# EAGLE board duplicated_boards (EAGLE 7.2.0), part 1 of 2
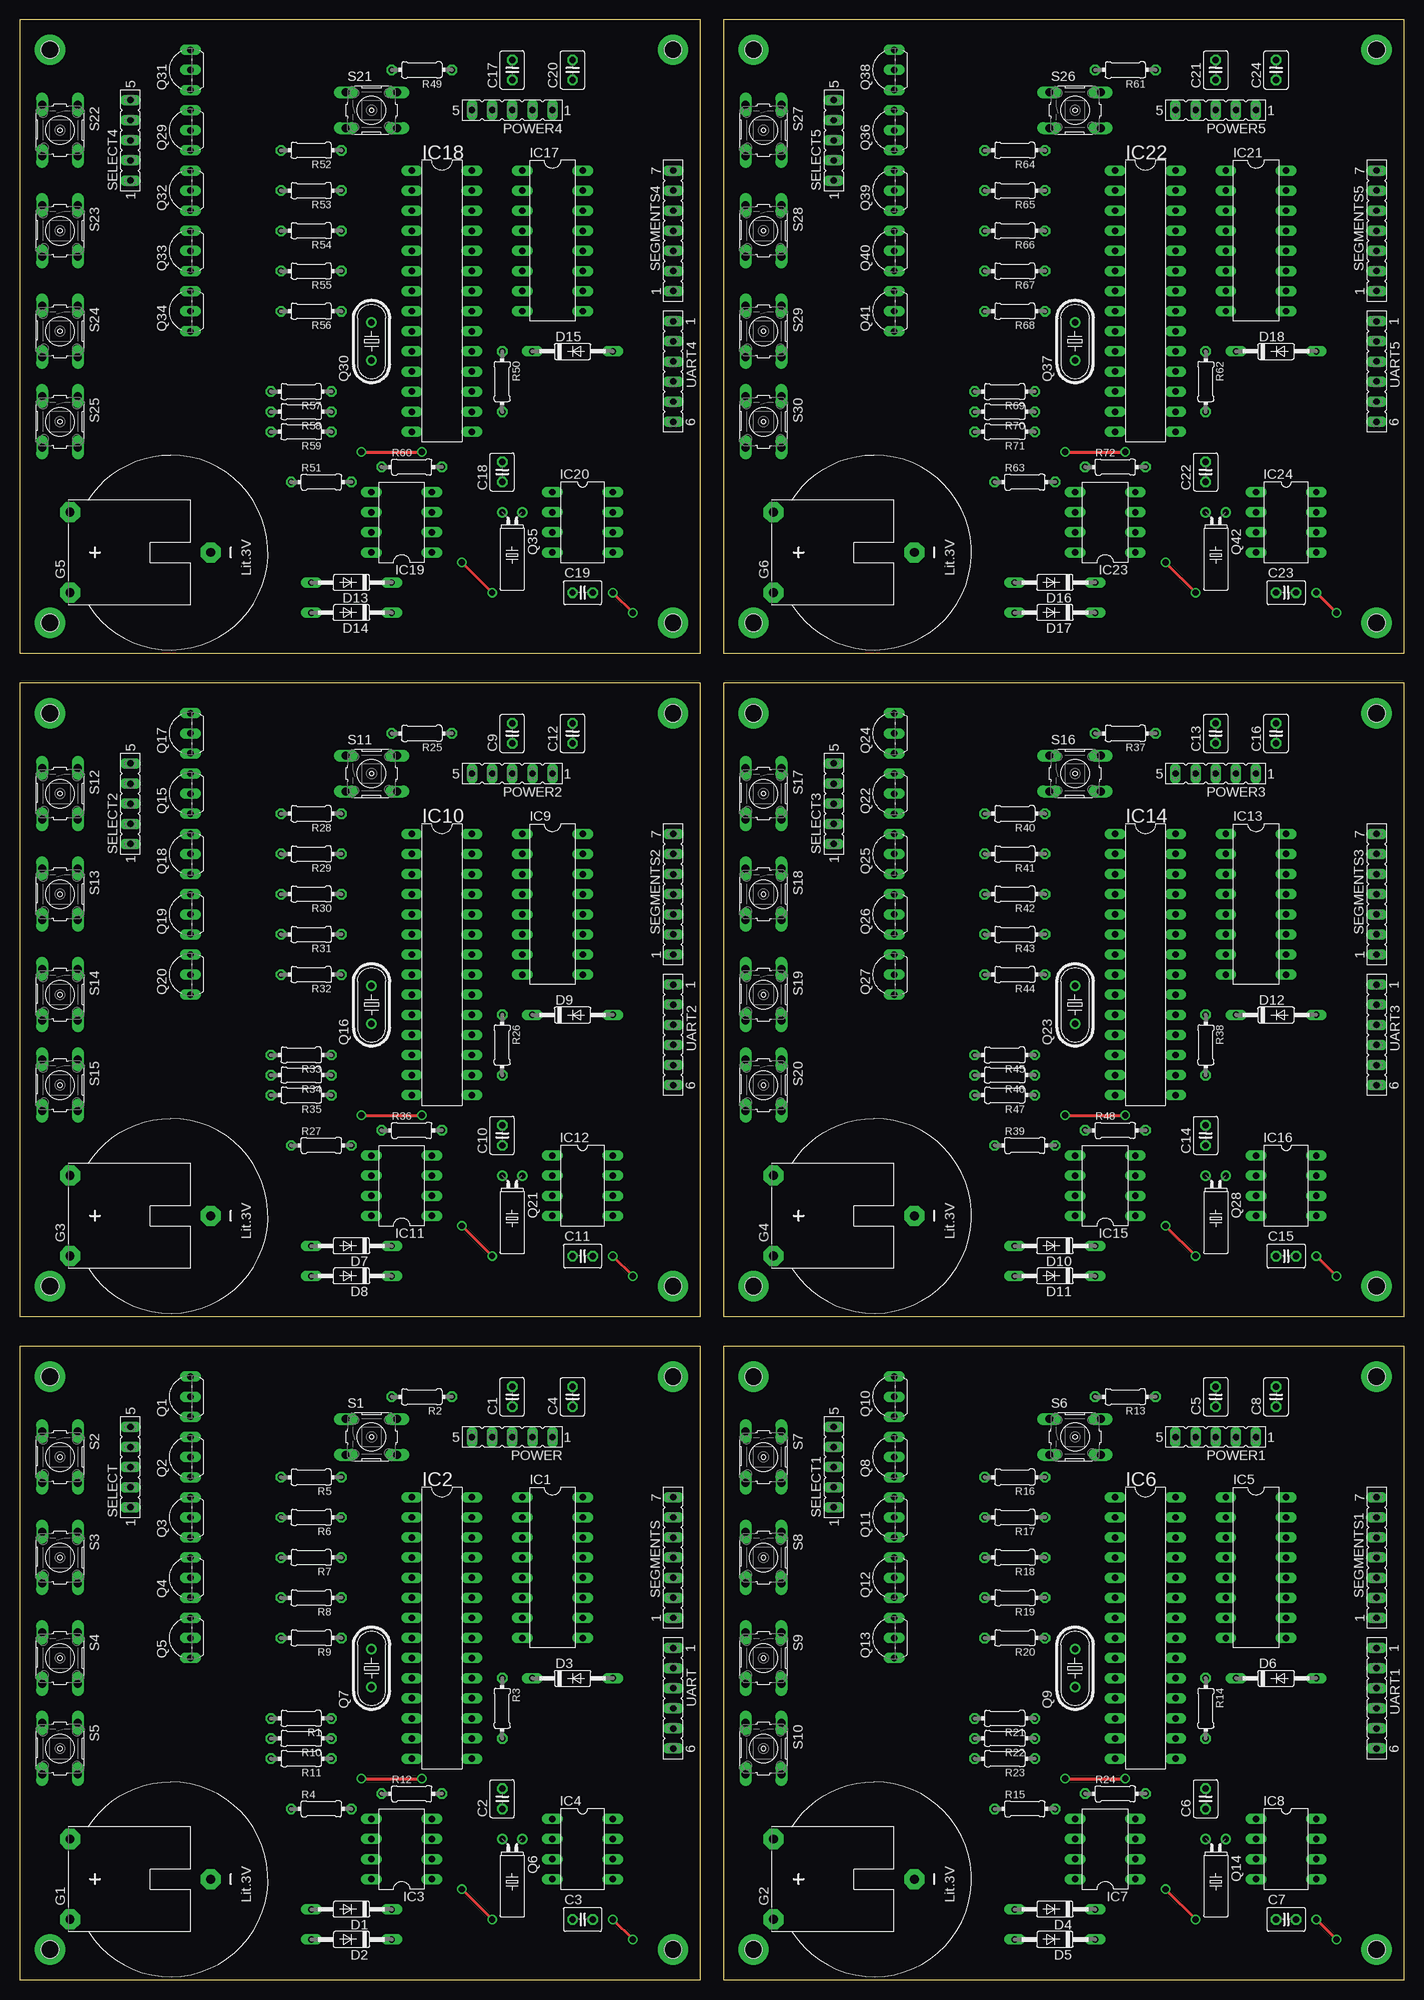
[diagram p0: board, top side]
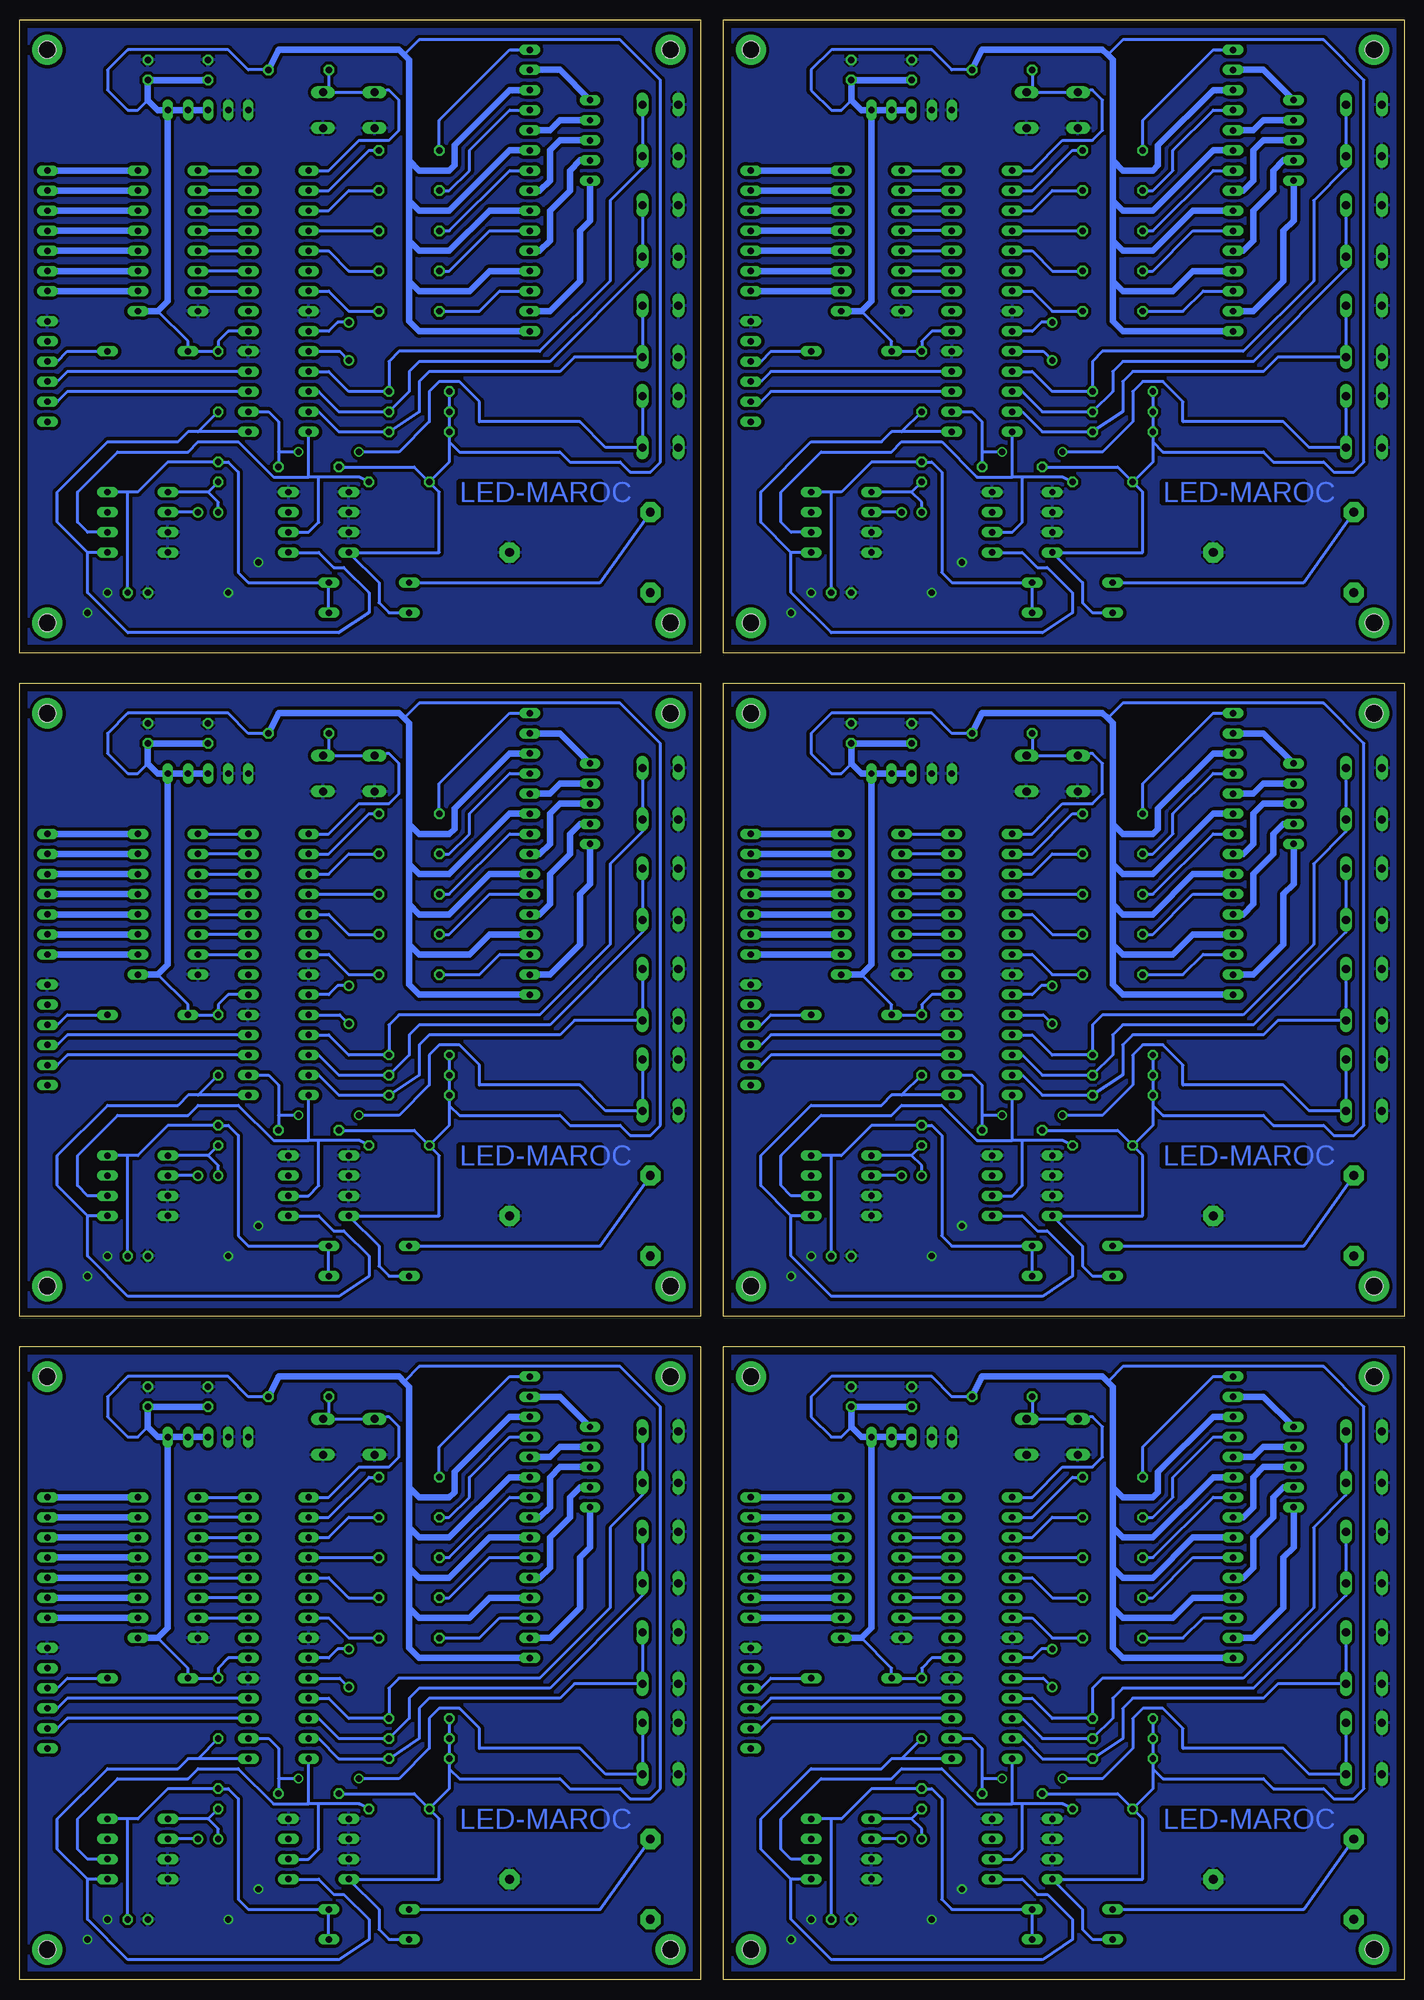
[diagram p1: board, bottom side, seen from below]

Size 174.93 x 247.64 mm. Coordinates in mm from the lower left corner, seen from the top.
Outline: 0,0 86.03,0 86.03,80 0,80 0,0
Outline: 88.9,0 174.93,0 174.93,80 88.9,80 88.9,0
Outline: 0,83.82 86.03,83.82 86.03,163.82 0,163.82 0,83.82
Outline: 88.9,83.82 174.93,83.82 174.93,163.82 88.9,163.82 88.9,83.82
Outline: 0,167.64 86.03,167.64 86.03,247.64 0,247.64 0,167.64
Outline: 88.9,167.64 174.93,167.64 174.93,247.64 88.9,247.64 88.9,167.64
Copper layers (1*16): Top 0.035mm / dielectric 1.5mm / Bottom 0.035mm
Design rules "default *": minimum track width 10mil, minimum drill 24mil, track to track 16mil, track to pad 16mil, pad to pad 16mil, via to via 16mil, smd to smd 8mil, copper to edge 40mil, drill to drill 8mil, minimum pad ring 10mil, minimum via ring 8mil, stop-mask expansion 4mil, vias tented up to drill 0mil, thermal gap 10mil
Holes 2.2 mm at 3.81,76.2 3.81,3.81 82.55,3.81 82.55,76.2 92.71,76.2 92.71,3.81 171.45,3.81 171.45,76.2 3.81,160.02 3.81,87.63 82.55,87.63 82.55,160.02 92.71,160.02 92.71,87.63 171.45,87.63 171.45,160.02 3.81,243.84 3.81,171.45 82.55,171.45 82.55,243.84 92.71,243.84 92.71,171.45 171.45,171.45 171.45,243.84

## Footprints (pad centres in the part's own frame; a part is rotated, then mirrored left to right if it is on the bottom)
C025-030X050 = drill 0.813 octagon: 1 -1.27,0; 2 1.27,0
DO35-10 = drill 0.813 long: A 5.08,0; C -5.08,0
CR2430H = drill 1.118 pad 2.54 octagon: + 5.08,12.7; +@1 -5.08,12.7; - 0,-5.08
DIL16 = drill 0.813 long: 1 -8.89,-3.81; 2 -6.35,-3.81; 3 -3.81,-3.81; 4 -1.27,-3.81; 5 1.27,-3.81; 6 3.81,-3.81; 7 6.35,-3.81; 8 8.89,-3.81; 9 8.89,3.81; 10 6.35,3.81; 11 3.81,3.81; 12 1.27,3.81; 13 -1.27,3.81; 14 -3.81,3.81; 15 -6.35,3.81; 16 -8.89,3.81
DIL28-3 = drill 0.813 long: 1 -16.51,-3.81; 2 -13.97,-3.81; 3 -11.43,-3.81; 4 -8.89,-3.81; 5 -6.35,-3.81; 6 -3.81,-3.81; 7 -1.27,-3.81; 8 1.27,-3.81; 9 3.81,-3.81; 10 6.35,-3.81; 11 8.89,-3.81; 12 11.43,-3.81; 13 13.97,-3.81; 14 16.51,-3.81; 15 16.51,3.81; 16 13.97,3.81; 17 11.43,3.81; 18 8.89,3.81; 19 6.35,3.81; 20 3.81,3.81; 21 1.27,3.81; 22 -1.27,3.81; 23 -3.81,3.81; 24 -6.35,3.81; 25 -8.89,3.81; 26 -11.43,3.81; 27 -13.97,3.81; 28 -16.51,3.81
DIL08 = drill 0.813 long: 1 -3.81,-3.81; 2 -1.27,-3.81; 3 1.27,-3.81; 4 3.81,-3.81; 5 3.81,3.81; 6 1.27,3.81; 7 -1.27,3.81; 8 -3.81,3.81
FE05-1 = drill 0.813 long: 1 -5.08,0; 2 -2.54,0; 3 0,0; 4 2.54,0; 5 5.08,0
TO92-BCE = drill 0.813 long: B 2.54,0; C 0,0; E -2.54,0
TC38H = drill 0.813: 1 -1.27,0; 2 1.27,0
HC49U-V = drill 0.813: 1 -2.413,0; 2 2.413,0
0204/7 = drill 0.813 octagon: 1 -3.81,0; 2 3.81,0
B3F-10XX = drill 1.016 long: 1 -3.251,2.261; 2 3.251,2.261; 3 -3.251,-2.261; 4 3.251,-2.261
FE07 = drill 0.813 long: 1 -7.62,0; 2 -5.08,0; 3 -2.54,0; 4 0,0; 5 2.54,0; 6 5.08,0; 7 7.62,0
FE06 = drill 0.813 long: 1 -6.35,0; 2 -3.81,0; 3 -1.27,0; 4 1.27,0; 5 3.81,0; 6 6.35,0

## Placement (x,y rotation side)
C1  100n  [C025-030X050]  62.23,73.66 90 top
C2  10p  [C025-030X050]  60.96,22.86 90 top
C3  470n  [C025-030X050]  71.12,7.62 0 top
C4  100n  [C025-030X050]  69.85,73.66 90 top
C5  100n  [C025-030X050]  151.13,73.66 90 top
C6  10p  [C025-030X050]  149.86,22.86 90 top
C7  470n  [C025-030X050]  160.02,7.62 0 top
C8  100n  [C025-030X050]  158.75,73.66 90 top
C9  100n  [C025-030X050]  62.23,157.48 90 top
C10  10p  [C025-030X050]  60.96,106.68 90 top
C11  470n  [C025-030X050]  71.12,91.44 0 top
C12  100n  [C025-030X050]  69.85,157.48 90 top
C13  100n  [C025-030X050]  151.13,157.48 90 top
C14  10p  [C025-030X050]  149.86,106.68 90 top
C15  470n  [C025-030X050]  160.02,91.44 0 top
C16  100n  [C025-030X050]  158.75,157.48 90 top
C17  100n  [C025-030X050]  62.23,241.3 90 top
C18  10p  [C025-030X050]  60.96,190.5 90 top
C19  470n  [C025-030X050]  71.12,175.26 0 top
C20  100n  [C025-030X050]  69.85,241.3 90 top
C21  100n  [C025-030X050]  151.13,241.3 90 top
C22  10p  [C025-030X050]  149.86,190.5 90 top
C23  470n  [C025-030X050]  160.02,175.26 0 top
C24  100n  [C025-030X050]  158.75,241.3 90 top
D1  1N4446  [DO35-10]  41.91,8.89 180 top
D2  1N4446  [DO35-10]  41.91,5.08 180 top
D3  1N4446  [DO35-10]  69.85,38.1 0 top
D4  1N4446  [DO35-10]  130.81,8.89 180 top
D5  1N4446  [DO35-10]  130.81,5.08 180 top
D6  1N4446  [DO35-10]  158.75,38.1 0 top
D7  1N4446  [DO35-10]  41.91,92.71 180 top
D8  1N4446  [DO35-10]  41.91,88.9 180 top
D9  1N4446  [DO35-10]  69.85,121.92 0 top
D10  1N4446  [DO35-10]  130.81,92.71 180 top
D11  1N4446  [DO35-10]  130.81,88.9 180 top
D12  1N4446  [DO35-10]  158.75,121.92 0 top
D13  1N4446  [DO35-10]  41.91,176.53 180 top
D14  1N4446  [DO35-10]  41.91,172.72 180 top
D15  1N4446  [DO35-10]  69.85,205.74 0 top
D16  1N4446  [DO35-10]  130.81,176.53 180 top
D17  1N4446  [DO35-10]  130.81,172.72 180 top
D18  1N4446  [DO35-10]  158.75,205.74 0 top
G1  CR2430H  [CR2430H]  19.05,12.7 90 top
G2  CR2430H  [CR2430H]  107.95,12.7 90 top
G3  CR2430H  [CR2430H]  19.05,96.52 90 top
G4  CR2430H  [CR2430H]  107.95,96.52 90 top
G5  CR2430H  [CR2430H]  19.05,180.34 90 top
G6  CR2430H  [CR2430H]  107.95,180.34 90 top
IC1  ULN2003AN  [DIL16]  67.31,52.07 270 top
IC2  PIC16876P  [DIL28-3]  53.34,44.45 270 top
IC3  DS1621  [DIL08]  48.26,16.51 90 top
IC4  PCF8583P  [DIL08]  71.12,16.51 270 top
IC5  ULN2003AN  [DIL16]  156.21,52.07 270 top
IC6  PIC16876P  [DIL28-3]  142.24,44.45 270 top
IC7  DS1621  [DIL08]  137.16,16.51 90 top
IC8  PCF8583P  [DIL08]  160.02,16.51 270 top
IC9  ULN2003AN  [DIL16]  67.31,135.89 270 top
IC10  PIC16876P  [DIL28-3]  53.34,128.27 270 top
IC11  DS1621  [DIL08]  48.26,100.33 90 top
IC12  PCF8583P  [DIL08]  71.12,100.33 270 top
IC13  ULN2003AN  [DIL16]  156.21,135.89 270 top
IC14  PIC16876P  [DIL28-3]  142.24,128.27 270 top
IC15  DS1621  [DIL08]  137.16,100.33 90 top
IC16  PCF8583P  [DIL08]  160.02,100.33 270 top
IC17  ULN2003AN  [DIL16]  67.31,219.71 270 top
IC18  PIC16876P  [DIL28-3]  53.34,212.09 270 top
IC19  DS1621  [DIL08]  48.26,184.15 90 top
IC20  PCF8583P  [DIL08]  71.12,184.15 270 top
IC21  ULN2003AN  [DIL16]  156.21,219.71 270 top
IC22  PIC16876P  [DIL28-3]  142.24,212.09 270 top
IC23  DS1621  [DIL08]  137.16,184.15 90 top
IC24  PCF8583P  [DIL08]  160.02,184.15 270 top
POWER  5V  [FE05-1]  62.23,68.58 180 top
POWER1  5V  [FE05-1]  151.13,68.58 180 top
POWER2  5V  [FE05-1]  62.23,152.4 180 top
POWER3  5V  [FE05-1]  151.13,152.4 180 top
POWER4  5V  [FE05-1]  62.23,236.22 180 top
POWER5  5V  [FE05-1]  151.13,236.22 180 top
Q1  BC369  [TO92-BCE]  21.59,73.66 90 top
Q2  BC369  [TO92-BCE]  21.59,66.04 90 top
Q3  BC369  [TO92-BCE]  21.59,58.42 90 top
Q4  BC369  [TO92-BCE]  21.59,50.8 90 top
Q5  BC369  [TO92-BCE]  21.59,43.18 90 top
Q6  37.xxKhz  [TC38H]  62.23,17.78 180 top
Q7  20Mhz  [HC49U-V]  44.45,39.37 90 top
Q8  BC369  [TO92-BCE]  110.49,66.04 90 top
Q9  20Mhz  [HC49U-V]  133.35,39.37 90 top
Q10  BC369  [TO92-BCE]  110.49,73.66 90 top
Q11  BC369  [TO92-BCE]  110.49,58.42 90 top
Q12  BC369  [TO92-BCE]  110.49,50.8 90 top
Q13  BC369  [TO92-BCE]  110.49,43.18 90 top
Q14  37.xxKhz  [TC38H]  151.13,17.78 180 top
Q15  BC369  [TO92-BCE]  21.59,149.86 90 top
Q16  20Mhz  [HC49U-V]  44.45,123.19 90 top
Q17  BC369  [TO92-BCE]  21.59,157.48 90 top
Q18  BC369  [TO92-BCE]  21.59,142.24 90 top
Q19  BC369  [TO92-BCE]  21.59,134.62 90 top
Q20  BC369  [TO92-BCE]  21.59,127 90 top
Q21  37.xxKhz  [TC38H]  62.23,101.6 180 top
Q22  BC369  [TO92-BCE]  110.49,149.86 90 top
Q23  20Mhz  [HC49U-V]  133.35,123.19 90 top
Q24  BC369  [TO92-BCE]  110.49,157.48 90 top
Q25  BC369  [TO92-BCE]  110.49,142.24 90 top
Q26  BC369  [TO92-BCE]  110.49,134.62 90 top
Q27  BC369  [TO92-BCE]  110.49,127 90 top
Q28  37.xxKhz  [TC38H]  151.13,101.6 180 top
Q29  BC369  [TO92-BCE]  21.59,233.68 90 top
Q30  20Mhz  [HC49U-V]  44.45,207.01 90 top
Q31  BC369  [TO92-BCE]  21.59,241.3 90 top
Q32  BC369  [TO92-BCE]  21.59,226.06 90 top
Q33  BC369  [TO92-BCE]  21.59,218.44 90 top
Q34  BC369  [TO92-BCE]  21.59,210.82 90 top
Q35  37.xxKhz  [TC38H]  62.23,185.42 180 top
Q36  BC369  [TO92-BCE]  110.49,233.68 90 top
Q37  20Mhz  [HC49U-V]  133.35,207.01 90 top
Q38  BC369  [TO92-BCE]  110.49,241.3 90 top
Q39  BC369  [TO92-BCE]  110.49,226.06 90 top
Q40  BC369  [TO92-BCE]  110.49,218.44 90 top
Q41  BC369  [TO92-BCE]  110.49,210.82 90 top
Q42  37.xxKhz  [TC38H]  151.13,185.42 180 top
R1  10k  [0204/7]  35.56,33.02 180 top
R2  [0204/7]  50.8,73.66 180 top
R3  4.7k  [0204/7]  60.96,34.29 270 top
R4  4.7k  [0204/7]  38.1,21.59 0 top
R5  [0204/7]  36.83,63.5 180 top
R6  [0204/7]  36.83,58.42 180 top
R7  [0204/7]  36.83,53.34 180 top
R8  [0204/7]  36.83,48.26 180 top
R9  [0204/7]  36.83,43.18 180 top
R10  10k  [0204/7]  35.56,30.48 180 top
R11  10k  [0204/7]  35.56,27.94 180 top
R12  [0204/7]  49.53,23.5 0 top
R13  [0204/7]  139.7,73.66 180 top
R14  4.7k  [0204/7]  149.86,34.29 270 top
R15  4.7k  [0204/7]  127,21.59 0 top
R16  [0204/7]  125.73,63.5 180 top
R17  [0204/7]  125.73,58.42 180 top
R18  [0204/7]  125.73,53.34 180 top
R19  [0204/7]  125.73,48.26 180 top
R20  [0204/7]  125.73,43.18 180 top
R21  10k  [0204/7]  124.46,33.02 180 top
R22  10k  [0204/7]  124.46,30.48 180 top
R23  10k  [0204/7]  124.46,27.94 180 top
R24  [0204/7]  138.43,23.5 0 top
R25  [0204/7]  50.8,157.48 180 top
R26  4.7k  [0204/7]  60.96,118.11 270 top
R27  4.7k  [0204/7]  38.1,105.41 0 top
R28  [0204/7]  36.83,147.32 180 top
R29  [0204/7]  36.83,142.24 180 top
R30  [0204/7]  36.83,137.16 180 top
R31  [0204/7]  36.83,132.08 180 top
R32  [0204/7]  36.83,127 180 top
R33  10k  [0204/7]  35.56,116.84 180 top
R34  10k  [0204/7]  35.56,114.3 180 top
R35  10k  [0204/7]  35.56,111.76 180 top
R36  [0204/7]  49.53,107.31 0 top
R37  [0204/7]  139.7,157.48 180 top
R38  4.7k  [0204/7]  149.86,118.11 270 top
R39  4.7k  [0204/7]  127,105.41 0 top
R40  [0204/7]  125.73,147.32 180 top
R41  [0204/7]  125.73,142.24 180 top
R42  [0204/7]  125.73,137.16 180 top
R43  [0204/7]  125.73,132.08 180 top
R44  [0204/7]  125.73,127 180 top
R45  10k  [0204/7]  124.46,116.84 180 top
R46  10k  [0204/7]  124.46,114.3 180 top
R47  10k  [0204/7]  124.46,111.76 180 top
R48  [0204/7]  138.43,107.31 0 top
R49  [0204/7]  50.8,241.3 180 top
R50  4.7k  [0204/7]  60.96,201.93 270 top
R51  4.7k  [0204/7]  38.1,189.23 0 top
R52  [0204/7]  36.83,231.14 180 top
R53  [0204/7]  36.83,226.06 180 top
R54  [0204/7]  36.83,220.98 180 top
R55  [0204/7]  36.83,215.9 180 top
R56  [0204/7]  36.83,210.82 180 top
R57  10k  [0204/7]  35.56,200.66 180 top
R58  10k  [0204/7]  35.56,198.12 180 top
R59  10k  [0204/7]  35.56,195.58 180 top
R60  [0204/7]  49.53,191.13 0 top
R61  [0204/7]  139.7,241.3 180 top
R62  4.7k  [0204/7]  149.86,201.93 270 top
R63  4.7k  [0204/7]  127,189.23 0 top
R64  [0204/7]  125.73,231.14 180 top
R65  [0204/7]  125.73,226.06 180 top
R66  [0204/7]  125.73,220.98 180 top
R67  [0204/7]  125.73,215.9 180 top
R68  [0204/7]  125.73,210.82 180 top
R69  10k  [0204/7]  124.46,200.66 180 top
R70  10k  [0204/7]  124.46,198.12 180 top
R71  10k  [0204/7]  124.46,195.58 180 top
R72  [0204/7]  138.43,191.13 0 top
S1  [B3F-10XX]  44.45,68.58 0 top
S2  [B3F-10XX]  5.08,66.04 270 top
S3  [B3F-10XX]  5.08,53.34 270 top
S4  [B3F-10XX]  5.08,40.64 270 top
S5  [B3F-10XX]  5.08,29.21 270 top
S6  [B3F-10XX]  133.35,68.58 0 top
S7  [B3F-10XX]  93.98,66.04 270 top
S8  [B3F-10XX]  93.98,53.34 270 top
S9  [B3F-10XX]  93.98,40.64 270 top
S10  [B3F-10XX]  93.98,29.21 270 top
S11  [B3F-10XX]  44.45,152.4 0 top
S12  [B3F-10XX]  5.08,149.86 270 top
S13  [B3F-10XX]  5.08,137.16 270 top
S14  [B3F-10XX]  5.08,124.46 270 top
S15  [B3F-10XX]  5.08,113.03 270 top
S16  [B3F-10XX]  133.35,152.4 0 top
S17  [B3F-10XX]  93.98,149.86 270 top
S18  [B3F-10XX]  93.98,137.16 270 top
S19  [B3F-10XX]  93.98,124.46 270 top
S20  [B3F-10XX]  93.98,113.03 270 top
S21  [B3F-10XX]  44.45,236.22 0 top
S22  [B3F-10XX]  5.08,233.68 270 top
S23  [B3F-10XX]  5.08,220.98 270 top
S24  [B3F-10XX]  5.08,208.28 270 top
S25  [B3F-10XX]  5.08,196.85 270 top
S26  [B3F-10XX]  133.35,236.22 0 top
S27  [B3F-10XX]  93.98,233.68 270 top
S28  [B3F-10XX]  93.98,220.98 270 top
S29  [B3F-10XX]  93.98,208.28 270 top
S30  [B3F-10XX]  93.98,196.85 270 top
SEGMENTS  [FE07]  82.55,53.34 90 top
SEGMENTS1  [FE07]  171.45,53.34 90 top
SEGMENTS2  [FE07]  82.55,137.16 90 top
SEGMENTS3  [FE07]  171.45,137.16 90 top
SEGMENTS4  [FE07]  82.55,220.98 90 top
SEGMENTS5  [FE07]  171.45,220.98 90 top
SELECT  [FE05-1]  13.97,64.77 90 top
SELECT1  [FE05-1]  102.87,64.77 90 top
SELECT2  [FE05-1]  13.97,148.59 90 top
SELECT3  [FE05-1]  102.87,148.59 90 top
SELECT4  [FE05-1]  13.97,232.41 90 top
SELECT5  [FE05-1]  102.87,232.41 90 top
UART  [FE06]  82.55,35.56 270 top
UART1  [FE06]  171.45,35.56 270 top
UART2  [FE06]  82.55,119.38 270 top
UART3  [FE06]  171.45,119.38 270 top
UART4  [FE06]  82.55,203.2 270 top
UART5  [FE06]  171.45,203.2 270 top

## Library data of the parts
C1-C24 R1-R72 = rcl
D1-D18 = diode
G1-G6 = battery
IC1 IC5 IC9 IC13 IC17 IC21 = uln-udn
IC2 IC6 IC10 IC14 IC18 IC22 = microchip; OC_FARNELL: unknown; OC_NEWARK: unknown
IC3 IC7 IC11 IC15 IC19 IC23 = maxim; MPN: DS1621; OC_FARNELL: 1188024; OC_NEWARK: 66F3769
IC4 IC8 IC12 IC16 IC20 IC24 = ds1307_pcf8583
POWER POWER1-POWER5 SEGMENTS SEGMENTS1-SEGMENTS5 SELECT SELECT1-SELECT5 UART UART1-UART5 = con-lsta; OC_FARNELL: unknown; OC_NEWARK: unknown
Q1-Q5 Q8 Q10-Q13 Q15 Q17-Q20 Q22 Q24-Q27 Q29 Q31-Q34 Q36 Q38-Q41 = transistor-pnp
Q6 Q14 Q21 Q28 Q35 Q42 = crystal; OC_FARNELL: unknown; OC_NEWARK: unknown
Q7 Q9 Q16 Q23 Q30 Q37 = crystal; OC_FARNELL: 1666969; OC_NEWARK: unknown
S1-S30 = switch-omron; MPN: B3F-1000; OC_FARNELL: 176432; OC_NEWARK: 36M3542

## Nets
+5V: C1.1 C4.1 D2.A D3.C IC1.9 IC2.20 IC3.8 POWER.1 POWER.2 POWER.3 Q1.E Q2.E Q3.E Q4.E Q5.E R1.2 R2.1 R3.1 R4.1 R10.2 R11.2 R12.1
+5V1: C5.1 C8.1 D5.A D6.C IC5.9 IC6.20 IC7.8 POWER1.1 POWER1.2 POWER1.3 Q8.E Q10.E Q11.E Q12.E Q13.E R13.1 R14.1 R15.1 R21.2 R22.2 R23.2 R24.1
+5V2: C9.1 C12.1 D8.A D9.C IC9.9 IC10.20 IC11.8 POWER2.1 POWER2.2 POWER2.3 Q15.E Q17.E Q18.E Q19.E Q20.E R25.1 R26.1 R27.1 R33.2 R34.2 R35.2 R36.1
+5V3: C13.1 C16.1 D11.A D12.C IC13.9 IC14.20 IC15.8 POWER3.1 POWER3.2 POWER3.3 Q22.E Q24.E Q25.E Q26.E Q27.E R37.1 R38.1 R39.1 R45.2 R46.2 R47.2 R48.1
+5V4: C17.1 C20.1 D14.A D15.C IC17.9 IC18.20 IC19.8 POWER4.1 POWER4.2 POWER4.3 Q29.E Q31.E Q32.E Q33.E Q34.E R49.1 R50.1 R51.1 R57.2 R58.2 R59.2 R60.1
+5V5: C21.1 C24.1 D17.A D18.C IC21.9 IC22.20 IC23.8 POWER5.1 POWER5.2 POWER5.3 Q36.E Q38.E Q39.E Q40.E Q41.E R61.1 R62.1 R63.1 R69.2 R70.2 R71.2 R72.1
GND: C1.2 C3.1 C4.2 G1.- IC1.8 IC2.8 IC2.19 IC3.4 IC3.5 IC3.6 IC3.7 IC4.3 IC4.4 POWER.4 POWER.5 S1.3 S1.4 S2.3 S2.4 S3.3 S3.4 S4.3 S4.4 S5.3 S5.4 UART.1
GND1: C5.2 C7.1 C8.2 G2.- IC5.8 IC6.8 IC6.19 IC7.4 IC7.5 IC7.6 IC7.7 IC8.3 IC8.4 POWER1.4 POWER1.5 S6.3 S6.4 S7.3 S7.4 S8.3 S8.4 S9.3 S9.4 S10.3 S10.4 UART1.1
GND2: C9.2 C11.1 C12.2 G3.- IC9.8 IC10.8 IC10.19 IC11.4 IC11.5 IC11.6 IC11.7 IC12.3 IC12.4 POWER2.4 POWER2.5 S11.3 S11.4 S12.3 S12.4 S13.3 S13.4 S14.3 S14.4 S15.3 S15.4 UART2.1
GND3: C13.2 C15.1 C16.2 G4.- IC13.8 IC14.8 IC14.19 IC15.4 IC15.5 IC15.6 IC15.7 IC16.3 IC16.4 POWER3.4 POWER3.5 S16.3 S16.4 S17.3 S17.4 S18.3 S18.4 S19.3 S19.4 S20.3 S20.4 UART3.1
GND4: C17.2 C19.1 C20.2 G5.- IC17.8 IC18.8 IC18.19 IC19.4 IC19.5 IC19.6 IC19.7 IC20.3 IC20.4 POWER4.4 POWER4.5 S21.3 S21.4 S22.3 S22.4 S23.3 S23.4 S24.3 S24.4 S25.3 S25.4 UART4.1
GND5: C21.2 C23.1 C24.2 G6.- IC21.8 IC22.8 IC22.19 IC23.4 IC23.5 IC23.6 IC23.7 IC24.3 IC24.4 POWER5.4 POWER5.5 S26.3 S26.4 S27.3 S27.4 S28.3 S28.4 S29.3 S29.4 S30.3 S30.4 UART5.1
J_SEG_DATA0: IC1.16 SEGMENTS.7
J_SEG_DATA1: IC1.15 SEGMENTS.6
J_SEG_DATA2: IC1.14 SEGMENTS.5
J_SEG_DATA3: IC1.13 SEGMENTS.4
J_SEG_DATA4: IC1.12 SEGMENTS.3
J_SEG_DATA5: IC1.11 SEGMENTS.2
J_SEG_DATA6: IC1.10 SEGMENTS.1
J_SEG_DATA7: IC5.16 SEGMENTS1.7
J_SEG_DATA8: IC5.15 SEGMENTS1.6
J_SEG_DATA9: IC5.14 SEGMENTS1.5
J_SEG_DATA10: IC5.13 SEGMENTS1.4
J_SEG_DATA11: IC5.12 SEGMENTS1.3
J_SEG_DATA12: IC5.11 SEGMENTS1.2
J_SEG_DATA13: IC5.10 SEGMENTS1.1
J_SEG_DATA14: IC9.16 SEGMENTS2.7
J_SEG_DATA15: IC9.15 SEGMENTS2.6
J_SEG_DATA16: IC9.14 SEGMENTS2.5
J_SEG_DATA17: IC9.13 SEGMENTS2.4
J_SEG_DATA18: IC9.12 SEGMENTS2.3
J_SEG_DATA19: IC9.11 SEGMENTS2.2
J_SEG_DATA20: IC9.10 SEGMENTS2.1
J_SEG_DATA21: IC13.16 SEGMENTS3.7
J_SEG_DATA22: IC13.15 SEGMENTS3.6
J_SEG_DATA23: IC13.14 SEGMENTS3.5
J_SEG_DATA24: IC13.13 SEGMENTS3.4
J_SEG_DATA25: IC13.12 SEGMENTS3.3
J_SEG_DATA26: IC13.11 SEGMENTS3.2
J_SEG_DATA27: IC13.10 SEGMENTS3.1
J_SEG_DATA28: IC17.16 SEGMENTS4.7
J_SEG_DATA29: IC17.15 SEGMENTS4.6
J_SEG_DATA30: IC17.14 SEGMENTS4.5
J_SEG_DATA31: IC17.13 SEGMENTS4.4
J_SEG_DATA32: IC17.12 SEGMENTS4.3
J_SEG_DATA33: IC17.11 SEGMENTS4.2
J_SEG_DATA34: IC17.10 SEGMENTS4.1
J_SEG_DATA35: IC21.16 SEGMENTS5.7
J_SEG_DATA36: IC21.15 SEGMENTS5.6
J_SEG_DATA37: IC21.14 SEGMENTS5.5
J_SEG_DATA38: IC21.13 SEGMENTS5.4
J_SEG_DATA39: IC21.12 SEGMENTS5.3
J_SEG_DATA40: IC21.11 SEGMENTS5.2
J_SEG_DATA41: IC21.10 SEGMENTS5.1
J_SEG_SELECT0: Q1.C SELECT.5
J_SEG_SELECT1: Q2.C SELECT.4
J_SEG_SELECT2: Q3.C SELECT.3
J_SEG_SELECT3: Q4.C SELECT.2
J_SEG_SELECT4: Q5.C SELECT.1
J_SEG_SELECT5: Q8.C SELECT1.4
J_SEG_SELECT6: Q13.C SELECT1.1
J_SEG_SELECT7: Q10.C SELECT1.5
J_SEG_SELECT8: Q11.C SELECT1.3
J_SEG_SELECT9: Q12.C SELECT1.2
J_SEG_SELECT10: Q15.C SELECT2.4
J_SEG_SELECT11: Q20.C SELECT2.1
J_SEG_SELECT12: Q17.C SELECT2.5
J_SEG_SELECT13: Q18.C SELECT2.3
J_SEG_SELECT14: Q19.C SELECT2.2
J_SEG_SELECT15: Q22.C SELECT3.4
J_SEG_SELECT16: Q27.C SELECT3.1
J_SEG_SELECT17: Q24.C SELECT3.5
J_SEG_SELECT18: Q25.C SELECT3.3
J_SEG_SELECT19: Q26.C SELECT3.2
J_SEG_SELECT20: Q29.C SELECT4.4
J_SEG_SELECT21: Q34.C SELECT4.1
J_SEG_SELECT22: Q31.C SELECT4.5
J_SEG_SELECT23: Q32.C SELECT4.3
J_SEG_SELECT24: Q33.C SELECT4.2
J_SEG_SELECT25: Q36.C SELECT5.4
J_SEG_SELECT26: Q41.C SELECT5.1
J_SEG_SELECT27: Q38.C SELECT5.5
J_SEG_SELECT28: Q39.C SELECT5.3
J_SEG_SELECT29: Q40.C SELECT5.2
N$1: IC1.1 IC2.28
N$2: IC1.2 IC2.27
N$3: IC1.3 IC2.26
N$4: IC1.4 IC2.25
N$5: IC1.5 IC2.24
N$6: C2.1 IC4.1 Q6.2
N$7: IC1.7 IC2.22
N$8: IC2.1 R2.2 S1.1 S1.2
N$9: IC2.2 R5.1
N$10: IC2.10 Q7.1
N$11: IC4.2 Q6.1
N$12: D1.A G1.+
N$13: IC1.6 IC2.23
N$15: C2.2 C3.2 D1.C D2.C IC4.8
N$16: IC2.9 Q7.2
N$17: IC2.3 R6.1
N$18: IC2.4 R7.1
N$19: IC2.5 R8.1
N$20: IC2.7 R9.1
N$24: IC5.7 IC6.22
N$25: UART.2
N$26: D3.A UART.3
N$27: IC5.6 IC6.23
N$28: IC5.5 IC6.24
N$29: UART.6
N$30: IC5.1 IC6.28
N$31: IC5.2 IC6.27
N$32: IC5.3 IC6.26
N$33: IC5.4 IC6.25
N$34: IC6.9 Q9.2
N$35: IC6.10 Q9.1
N$36: C6.1 IC8.1 Q14.2
N$37: IC8.2 Q14.1
N$38: D4.A G2.+
N$39: C6.2 C7.2 D4.C D5.C IC8.8
N$40: IC6.1 R13.2 S6.1 S6.2
N$41: UART1.2
N$42: D6.A UART1.3
N$43: UART1.6
N$44: IC6.2 R16.1
N$45: IC6.3 R17.1
N$46: IC6.5 R19.1
N$47: IC6.7 R20.1
N$48: IC6.4 R18.1
N$53: IC9.7 IC10.22
N$54: IC9.6 IC10.23
N$55: IC9.5 IC10.24
N$56: IC9.1 IC10.28
N$57: IC9.2 IC10.27
N$58: IC9.3 IC10.26
N$59: IC9.4 IC10.25
N$60: IC10.9 Q16.2
N$61: IC10.10 Q16.1
N$62: C10.1 IC12.1 Q21.2
N$63: IC12.2 Q21.1
N$64: D7.A G3.+
N$65: C10.2 C11.2 D7.C D8.C IC12.8
N$66: IC10.1 R25.2 S11.1 S11.2
N$67: UART2.2
N$68: D9.A UART2.3
N$69: UART2.6
N$70: IC10.2 R28.1
N$71: IC10.3 R29.1
N$72: IC10.5 R31.1
N$73: IC10.7 R32.1
N$74: IC10.4 R30.1
N$79: IC13.7 IC14.22
N$80: IC13.6 IC14.23
N$81: IC13.5 IC14.24
N$82: IC13.1 IC14.28
N$83: IC13.2 IC14.27
N$84: IC13.3 IC14.26
N$85: IC13.4 IC14.25
N$86: IC14.9 Q23.2
N$87: IC14.10 Q23.1
N$88: C14.1 IC16.1 Q28.2
N$89: IC16.2 Q28.1
N$90: D10.A G4.+
N$91: C14.2 C15.2 D10.C D11.C IC16.8
N$92: IC14.1 R37.2 S16.1 S16.2
N$93: UART3.2
N$94: D12.A UART3.3
N$95: UART3.6
N$96: IC14.2 R40.1
N$97: IC14.3 R41.1
N$98: IC14.5 R43.1
N$99: IC14.7 R44.1
N$100: IC14.4 R42.1
N$105: IC17.7 IC18.22
N$106: IC17.6 IC18.23
N$107: IC17.5 IC18.24
N$108: IC17.1 IC18.28
N$109: IC17.2 IC18.27
N$110: IC17.3 IC18.26
N$111: IC17.4 IC18.25
N$112: IC18.9 Q30.2
N$113: IC18.10 Q30.1
N$114: C18.1 IC20.1 Q35.2
N$115: IC20.2 Q35.1
N$116: D13.A G5.+
N$117: C18.2 C19.2 D13.C D14.C IC20.8
N$118: IC18.1 R49.2 S21.1 S21.2
N$119: UART4.2
N$120: D15.A UART4.3
N$121: UART4.6
N$122: IC18.2 R52.1
N$123: IC18.3 R53.1
N$124: IC18.5 R55.1
N$125: IC18.7 R56.1
N$126: IC18.4 R54.1
N$131: IC21.7 IC22.22
N$132: IC21.6 IC22.23
N$133: IC21.5 IC22.24
N$134: IC21.1 IC22.28
N$135: IC21.2 IC22.27
N$136: IC21.3 IC22.26
N$137: IC21.4 IC22.25
N$138: IC22.9 Q37.2
N$139: IC22.10 Q37.1
N$140: C22.1 IC24.1 Q42.2
N$141: IC24.2 Q42.1
N$142: D16.A G6.+
N$143: C22.2 C23.2 D16.C D17.C IC24.8
N$144: IC22.1 R61.2 S26.1 S26.2
N$145: UART5.2
N$146: D18.A UART5.3
N$147: UART5.6
N$148: IC22.2 R64.1
N$149: IC22.3 R65.1
N$150: IC22.5 R67.1
N$151: IC22.7 R68.1
N$152: IC22.4 R66.1
SCL: IC2.14 IC3.2 IC4.6 R4.2
SCL1: IC6.14 IC7.2 IC8.6 R15.2
SCL2: IC10.14 IC11.2 IC12.6 R27.2
SCL3: IC14.14 IC15.2 IC16.6 R39.2
SCL4: IC18.14 IC19.2 IC20.6 R51.2
SCL5: IC22.14 IC23.2 IC24.6 R63.2
SDA: IC2.15 IC3.1 IC4.5 R3.2
SDA1: IC6.15 IC7.1 IC8.5 R14.2
SDA2: IC10.15 IC11.1 IC12.5 R26.2
SDA3: IC14.15 IC15.1 IC16.5 R38.2
SDA4: IC18.15 IC19.1 IC20.5 R50.2
SDA5: IC22.15 IC23.1 IC24.5 R62.2
SEG1: Q1.B R5.2
SEG2: Q2.B R6.2
SEG3: Q3.B R7.2
SEG4: Q4.B R8.2
SEG5: Q5.B R9.2
SEG6: Q10.B R16.2
SEG7: Q11.B R18.2
SEG8: Q13.B R20.2
SEG9: Q8.B R17.2
SEG10: Q12.B R19.2
SEG11: Q17.B R28.2
SEG12: Q18.B R30.2
SEG13: Q20.B R32.2
SEG14: Q15.B R29.2
SEG15: Q19.B R31.2
SEG16: Q24.B R40.2
SEG17: Q25.B R42.2
SEG18: Q27.B R44.2
SEG19: Q22.B R41.2
SEG20: Q26.B R43.2
SEG21: Q31.B R52.2
SEG22: Q32.B R54.2
SEG23: Q34.B R56.2
SEG24: Q29.B R53.2
SEG25: Q33.B R55.2
SEG26: Q38.B R64.2
SEG27: Q39.B R66.2
SEG28: Q41.B R68.2
SEG29: Q36.B R65.2
SEG30: Q40.B R67.2
SW1: IC2.11 R1.1 S2.1 S2.2
SW2: IC2.12 R10.1 S3.1 S3.2
SW3: IC2.13 R11.1 S4.1 S4.2
SW4: IC2.16 R12.2 S5.1 S5.2
SW5: IC6.11 R21.1 S7.1 S7.2
SW6: IC6.12 R22.1 S8.1 S8.2
SW7: IC6.13 R23.1 S9.1 S9.2
SW8: IC6.16 R24.2 S10.1 S10.2
SW9: IC10.11 R33.1 S12.1 S12.2
SW10: IC10.12 R34.1 S13.1 S13.2
SW11: IC10.13 R35.1 S14.1 S14.2
SW12: IC10.16 R36.2 S15.1 S15.2
SW13: IC14.11 R45.1 S17.1 S17.2
SW14: IC14.12 R46.1 S18.1 S18.2
SW15: IC14.13 R47.1 S19.1 S19.2
SW16: IC14.16 R48.2 S20.1 S20.2
SW17: IC18.11 R57.1 S22.1 S22.2
SW18: IC18.12 R58.1 S23.1 S23.2
SW19: IC18.13 R59.1 S24.1 S24.2
SW20: IC18.16 R60.2 S25.1 S25.2
SW21: IC22.11 R69.1 S27.1 S27.2
SW22: IC22.12 R70.1 S28.1 S28.2
SW23: IC22.13 R71.1 S29.1 S29.2
SW24: IC22.16 R72.2 S30.1 S30.2
UART_RX: IC2.18 UART.4
UART_RX1: IC6.18 UART1.4
UART_RX2: IC10.18 UART2.4
UART_RX3: IC14.18 UART3.4
UART_RX4: IC18.18 UART4.4
UART_RX5: IC22.18 UART5.4
UART_TX: IC2.17 UART.5
UART_TX1: IC6.17 UART1.5
UART_TX2: IC10.17 UART2.5
UART_TX3: IC14.17 UART3.5
UART_TX4: IC18.17 UART4.5
UART_TX5: IC22.17 UART5.5